# Altium PCB CSM_PCB.PcbDoc
Units mm, origin at the board's own origin, x right, y up, seen from the top; angles counter-clockwise.
Board outline 100 x 50 mm, 2 copper layers (Top Layer, Bottom Layer); 23 components, 19 nets, 82 pads, 0 vias.
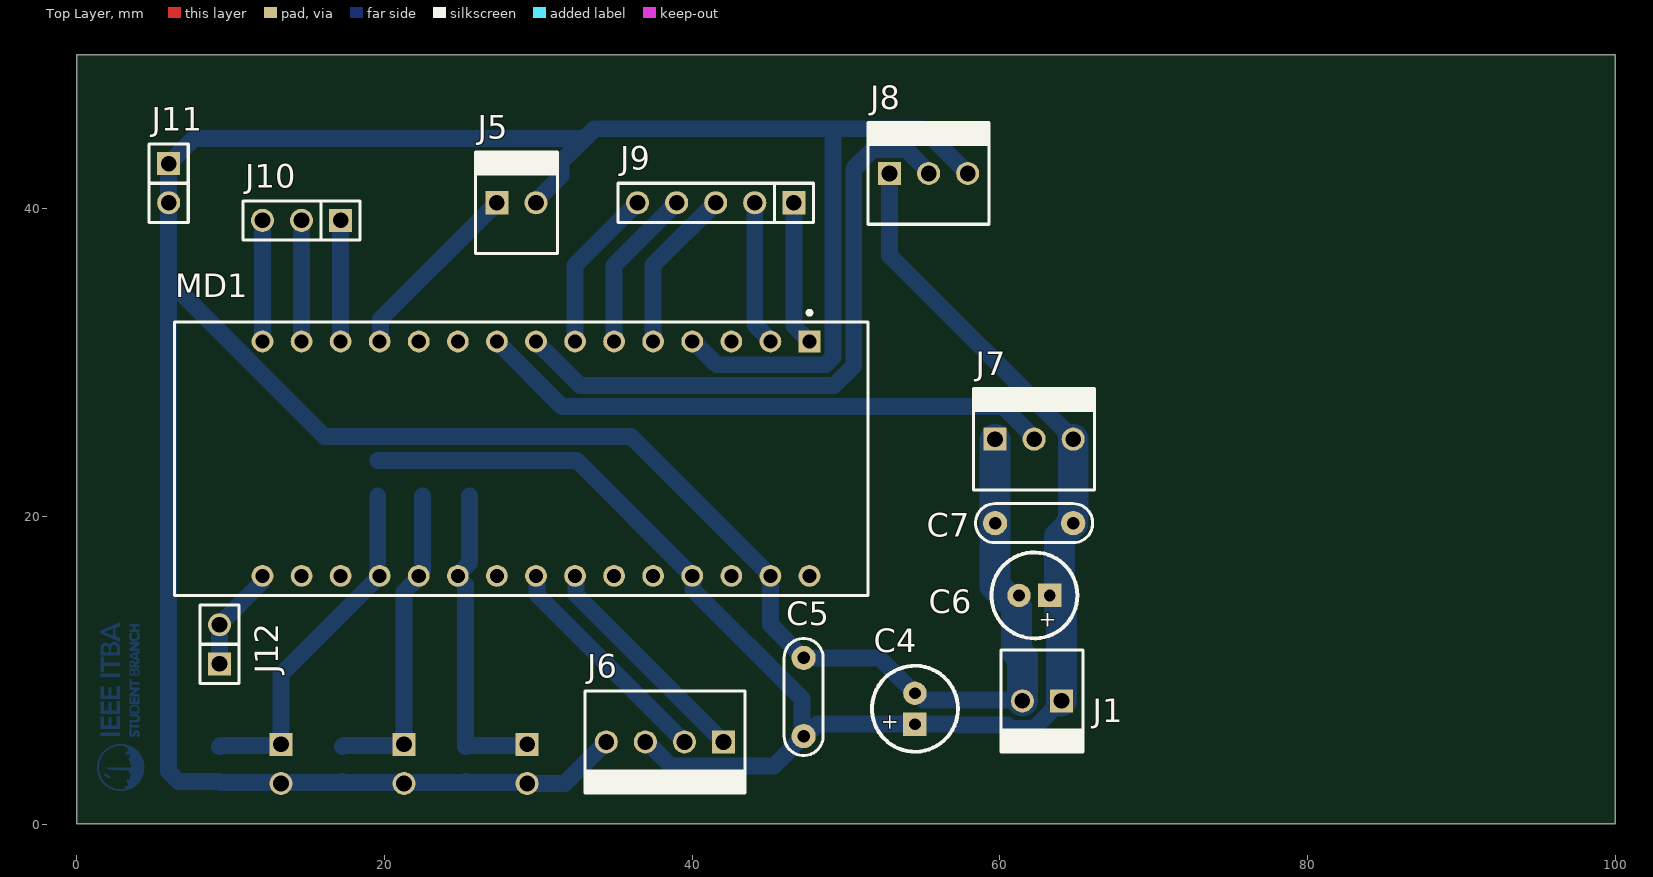
[diagram p0: Top Layer view]
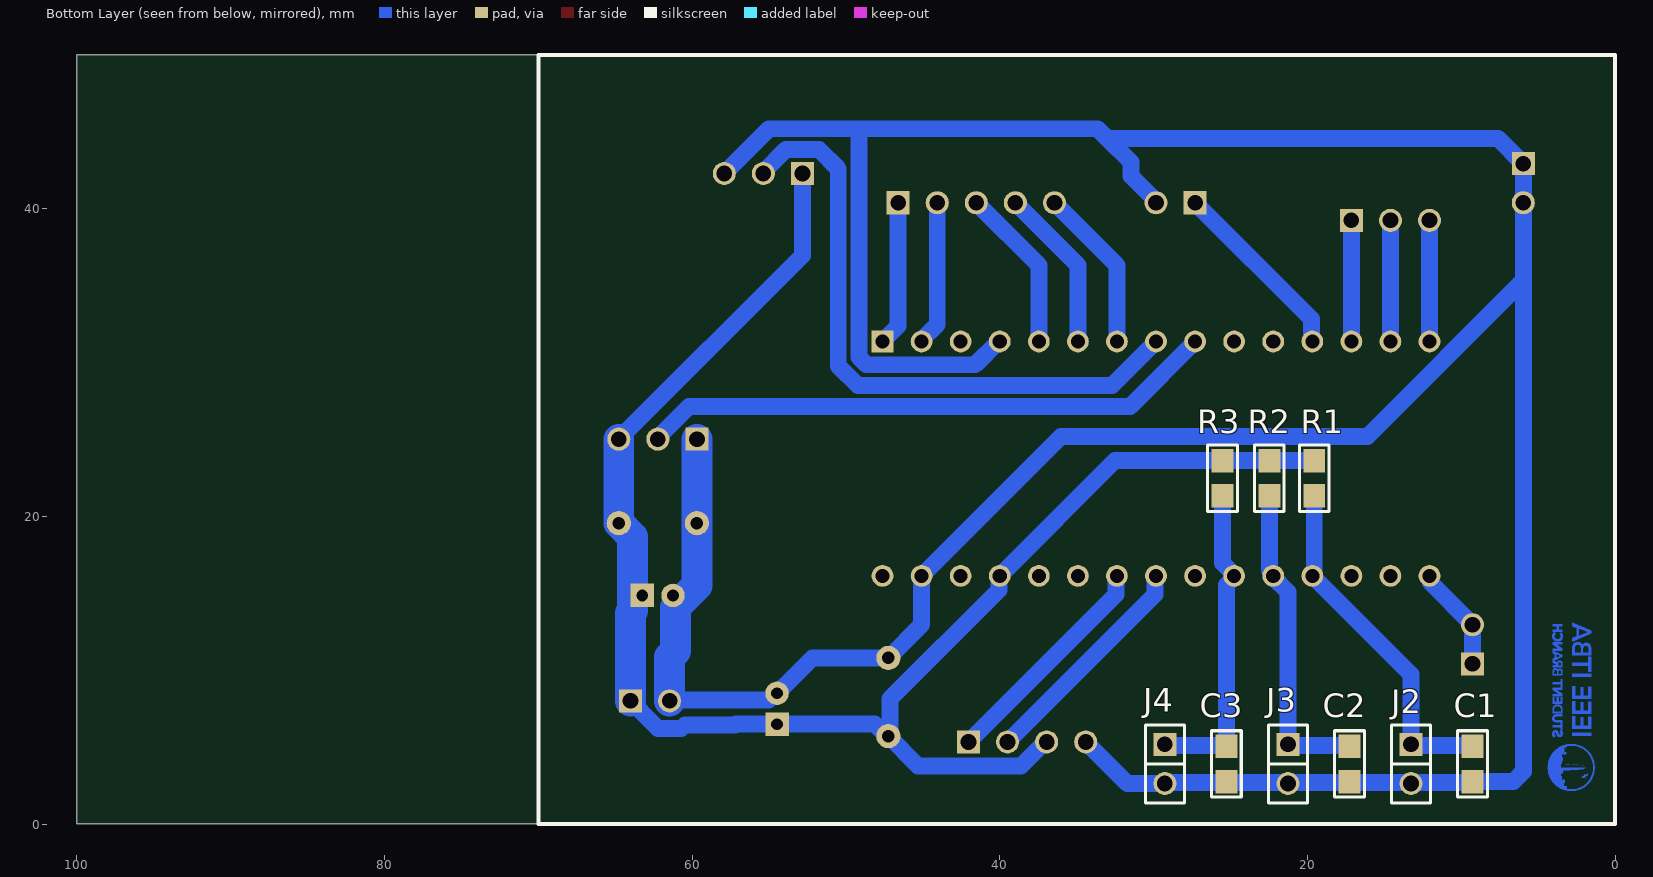
[diagram p1: Bottom Layer view, seen from below]

## Layer stack, top to bottom
Top Solder: solder mask 0.0102, Solder Resist, Dk 3.5
Top Layer: signal copper 0.0356
Dielectric 1: dielectric 0.32, FR-4, Dk 4.8
Bottom Layer: signal copper 0.0356
Bottom Solder: solder mask 0.0102, Solder Resist, Dk 3.5

## Board outline
0,0 0,50 100,50 100,0

## Design rules (kind name [scope] priority, off if disabled: settings)
Clearance [All] p1: gap=0.254 ignorepadtopadclearanceinfootprint=FALSE
PolygonConnect [All] p1: connectstyle=Relief reliefconductorwidth=0.254 reliefentries=4 polygonreliefangle="90 Angle" airgapwidth=0.254
RoutingVias [All] p1: holewidth=0.711 width=1.27 viastyle="Through Hole" minholewidth=0.711 minwidth=1.27 maxholewidth=0.711 maxwidth=1.27
SolderMaskExpansion [All] p1: expansion=0.102 istentingtop=FALSE
SupplyNets "Schematic Supply Nets_9" [InNet('Boton2')] p1: voltage=0.000
SupplyNets "Schematic Supply Nets_8" [InNet('+5')] p2: voltage=0.000
SupplyNets "Schematic Supply Nets_7" [InNet('Boton3')] p3: voltage=0.000
SupplyNets "Schematic Supply Nets_6" [InNet('Matrices')] p4: voltage=0.000
SupplyNets "Schematic Supply Nets_5" [InNet('GND')] p5: voltage=0.000
SupplyNets "Schematic Supply Nets_4" [InNet('Boton1')] p6: voltage=0.000
SupplyNets "Schematic Supply Nets_3" [InNet('SCL')] p7: voltage=0.000
SupplyNets "Schematic Supply Nets_2" [InNet('SDA')] p8: voltage=0.000
SupplyNets "Schematic Supply Nets_1" [InNet('DCF')] p9: voltage=0.000
SupplyNets "Schematic Supply Nets" [InNet('Buzzer')] p10: voltage=0.000
Width [All] p1: maxlimit=5 minlimit=0.254 preferedwidth=1.1 toplayer_maxwidth=0.254 toplayer_prefwidth=0.254 bottomlayer_minwidth=0.5 minimp=50.000000 maximp=50.000000 favimp=50.000000
30 further rules are at their usual default settings.

## Components (designator, comment, footprint, x,y, rotation, side; value= is the part's Value field where it differs from the comment)
C1 "100n" 0805 9.268,3.904 r270 bottom
C2 "100n" 0805 17.268,3.904 r270 bottom
C3 "100n" 0805 25.268,3.904 r270 bottom
C4 "10u" CAP100RP 54.483,7.493 r90 top
C5 "100n" CAP200 47.244,8.255 r90 top
C6 "10u" CAP100RP 62.246,14.859 r180 top
C7 "100n" CAP200 62.23,19.558 r180 top
J1 "Vcc" MOLEX2 64.008,8.001 r180 top
J2 "Button1" SIP2 13.268,3.904 r270 bottom
J3 "Button2" SIP2 21.268,3.904 r270 bottom
J4 "Button1" SIP2 29.268,3.904 r270 bottom
J5 "Buzzer" MOLEX2 27.305,40.386 r0 top
J6 "Pantalla" MOLEX4 42.037,5.334 r180 top
J7 "Matrices" MOLEX3 59.69,25.019 r0 top
J8 "DCF" MOLEX3 52.832,42.291 r0 top
J9 "Pines D0-D4" SIP5 46.609,40.386 r180 top
J10 "D10-D12" SIP3 14.605,39.243 r180 top
J11 "Ground" SIP2 5.969,41.656 r270 top
J12 "D13" SIP2 9.271,11.684 r90 top
MD1 "ARDUINO_NANO" FP-A000005-MFG 28.892,23.749 r270 top
R1 "10k" 0805 19.558,22.479 r270 bottom
R2 "10k" 0805 22.479,22.479 r270 bottom
R3 "10k" 0805 25.527,22.479 r270 bottom

## Footprints (in the part's own frame and the unit in brackets; to place one, negate y for a bottom-side part, rotate by r counter-clockwise, add the part's x,y. Pads: shape width x height; smd on the part's side, far side on the other; paste and mask are expansions set on the pad)
0805 [mil] "Pasivo 0805"
  rect 60x56 smd: 1(-45,0) 2(45,0)
  silkscreen extent -85,-38 85,38, body extent -40,-25 39,25, height 15
CAP100RP [mil] "Body diameter 5mm"
  rect 60x60 hole 30: 1(-39.37,0)
  round 60 hole 30: 2(39.37,0)
  silkscreen extent -110,-110 110,110, body extent -99,-99 99,100, height 454
CAP200 [mil]
  round 62 hole 32: 1(-100,0) 2(100,0)
  silkscreen extent -150,-50 150,50, body extent -110,-46 110,44, height 246
FP-A000005-MFG [mil]
  rect 55.67x55.67 hole 35.98 paste-99999 mask+0: 1(-300,737.5)
  round 55.67 hole 35.98 paste-99999 mask+0: 2(-300,637.5) 3(-300,537.5) 4(-300,437.5) 5(-300,337.5) 6(-300,237.5) 7(-300,137.5) 8(-300,37.5) 9(-300,-62.5) 10(-300,-162.5) 11(-300,-262.5) 12(-300,-362.5) 13(-300,-462.5) 14(-300,-562.5) 15(-300,-662.5) 16(300,-662.5) 17(300,-562.5) 18(300,-462.5) 19(300,-362.5) 20(300,-262.5) 21(300,-162.5) 22(300,-62.5) 23(300,37.5) 24(300,137.5) 25(300,237.5) 26(300,337.5) 27(300,437.5) 28(300,537.5) 29(300,637.5) 30(300,737.5)
  silkscreen extent -379,-888 350,888, body extent -354,-891 354,891, height 10
MOLEX2 [mm]
  rect 1.5x1.5 hole 1.016: 1(0,0)
  round 1.5 hole 1.016: 2(2.54,0)
  silkscreen extent -1.4,-3.3 3.94,3.3, body extent -1.27,-3.17 3.81,3.18, height 10.74
MOLEX3 [mm]
  rect 1.5x1.5 hole 1.016: 1(0,0)
  round 1.5 hole 1.016: 2(2.54,0) 3(5.08,0)
  silkscreen extent -1.4,-3.3 6.48,3.3, body extent -1.27,-3.17 6.35,3.17, height 10.74
MOLEX4 [mm]
  rect 1.5x1.5 hole 1.016: 1(0,0)
  round 1.5 hole 1.016: 2(2.54,0) 3(5.08,0) 4(7.62,0)
  silkscreen extent -1.4,-3.3 9.02,3.3, body extent -1.27,-3.17 8.89,3.18, height 10.74
SIP2 [mm]
  rect 1.5x1.5 hole 1.016: 1(-1.27,0)
  round 1.5 hole 1.016: 2(1.27,0)
  silkscreen extent -2.54,-1.27 2.54,1.27
SIP3 [mm]
  rect 1.5x1.5 hole 1.016: 1(-2.54,0)
  round 1.5 hole 1.016: 2(0,0) 3(2.54,0)
  silkscreen extent -3.81,-1.27 3.81,1.27, body extent -3.81,-1.3 3.81,1.24, height 8.38
SIP5 [mm]
  rect 1.5x1.5 hole 1.016: 1(0,0)
  round 1.5 hole 1.016: 2(2.54,0) 3(5.08,0) 4(7.62,0) 5(10.16,0)
  silkscreen extent -1.27,-1.27 11.43,1.27, body extent -1.27,-1.27 11.43,1.27, height 8.38

## Part data
C1 C2 C3 C5 C7: library part CAP
C4 C6: library part CAPPOL
J1: library part MOLEX2, "Tensión de alimentación"
J2 J3 J4 J11 J12: library part CON2
J5: library part MOLEX2
J6: library part MOLEX4
J7 J8: library part MOLEX3
J9: library part CON5
J10: library part CON3
MD1: library part CMP-189986-000002-1, "ARDUINO NANO ATMEGA328 EVAL BRD", Operating Supply Voltage=12V, Package Quantity=50, Core Architecture=AVR, Data Bus Width=8b, Evaluation Kit=Yes, Height=0.25inch, Interface=I2C, Length=7inch, Number of Bits=8, Packaging=Bulk, REACH SVHC="No SVHC", Series="AVR® ATmega", Weight=0.358383oz, Width=5inch
R1 R2 R3: library part RES

## Nets (pads, with @x,y where several pads share a name; then routed paths per layer and width w, separated by ;. In a path a pad name is that pad's centre, name@x,y a point inside that pad or via, vN(x,y) a via of type N, cw(c..) or ccw(c..) an arc to the next point about the centre after c; other vN are vias at no path point)
+5: C4.1 C5.1 C6.1 C7.1 J1.1 J6.3 J7.3 J8.1 MD1.27 R1.1 R2.1 R3.1 | length 106.3
  Bottom Layer w1.1: R1.1 R2.1 R3.1 32.512,23.622 MD1.27 40.065,16.069 40.065,15.222 47.153,8.134 47.153,5.806 C5.1 ; J6.3 37.065,5.334 38.619,3.78 45.309,3.78 C5.1 ; J8.1 52.832,36.957 J7.3 ; J1.1 63.272,7.265 63.272,7.254 62.215,6.197 60.721,6.197 60.471,6.447 57.213,6.447 57.167,6.493 C4.1 48.15,6.493 47.372,5.715 C5.1
  Bottom Layer w2: J1.1 64.008,13.716 63.881,13.843 63.881,18.669 C7.1 J7.3
Boton1: C1.1 J2.1 MD1.19 R1.2 | length 22.9
  Bottom Layer w1.1: C1.1 9.332,5.111 13.204,5.111 J2.1 13.268,9.712 MD1.19 19.685,16.214 19.558,16.341 R1.2
Boton2: C2.1 J3.1 MD1.20 R2.2 | length 20.7
  Bottom Layer w1.1: C2.1 17.331,5.111 21.204,5.111 J3.1 21.268,15.087 22.225,16.044 MD1.20 22.225,16.214 22.479,16.468 R2.2
Boton3: C3.1 J4.1 MD1.21 R3.2 | length 20.9
  Bottom Layer w1.1: R3.2 25.527,16.976 24.765,16.214 MD1.21 24.765,16.044 25.268,15.541 C3.1 25.331,5.111 29.205,5.111 J4.1
Buzzer: J5.1 MD1.12 | length 12.2
  Bottom Layer w1.1: MD1.12 19.745,31.429 19.745,32.826 J5.1
DCF: J8.2 MD1.8 | length 41.3
  Bottom Layer w1.1: MD1.8 32.71,28.504 49.226,28.504 50.503,29.781 50.503,42.599 51.749,43.845 53.915,43.845 55.372,42.388 J8.2
GND: C1.2 C2.2 C3.2 C4.2 C5.2 C6.2 C7.2 J1.2 J2.2 J3.2 J4.2 J5.2 J6.4 J7.1 J8.3 J11.1 J11.2 MD1.4 MD1.29 | length 240.5
  Bottom Layer w1.1: J5.2 29.845,40.494 31.477,42.126 31.477,43.034 33.02,44.577 ; J6.4 31.717,2.634 J4.2 29.205,2.698 25.331,2.698 C3.2 25.204,2.698 21.331,2.698 J3.2 21.204,2.698 17.331,2.698 C2.2 17.204,2.698 13.331,2.698 J2.2 13.204,2.698 9.332,2.698 C1.2 6.613,2.761 5.969,3.405 5.969,35.328 ; MD1.4 40.09,31.369 41.601,29.858 48.665,29.858 49.149,30.342 49.149,45.199 ; J8.3 55.004,45.199 49.149,45.199 ; J1.2 61.41,8.059 55.032,8.059 54.598,8.493 C4.2 52.181,10.795 C5.2 45.085,12.954 MD1.29 36.026,25.188 16.109,25.188 5.969,35.328 ; 5.969,35.328 J11.2 J11.1 7.62,44.577 33.02,44.577 ; 33.02,44.577 33.642,45.199 49.149,45.199
  Bottom Layer w2: J7.1 C7.2 59.69,15.494 61.087,14.097 61.087,11.24 61.468,10.859 J1.2
Matrices: J7.2 MD1.9 | length 37.6
  Bottom Layer w1.1: MD1.9 31.524,27.15 60.196,27.15 62.23,25.116 J7.2
NetJ9_1: J9.1 MD1.1 | length 9.4
  Bottom Layer w1.1: J9.1 46.609,32.385 MD1.1
NetJ9_2: J9.2 MD1.2 | length 9.4
  Bottom Layer w1.1: J9.2 44.069,32.47 45.085,31.454 MD1.2
NetJ9_3: J9.3 MD1.5 | length 10.7
  Bottom Layer w1.1: MD1.5 37.465,36.322 J9.3
NetJ9_4: J9.4 MD1.6 | length 10.7
  Bottom Layer w1.1: MD1.6 34.925,36.322 J9.4
NetJ9_5: J9.5 MD1.7 | length 10.7
  Bottom Layer w1.1: MD1.7 32.385,36.322 J9.5
NetJ10_1: J10.1 MD1.13 | length 7.9
  Bottom Layer w1.1: MD1.13 J10.1
NetJ10_2: J10.2 MD1.14 | length 7.9
  Bottom Layer w1.1: MD1.14 J10.2
NetJ10_3: J10.3 MD1.15 | length 7.9
  Bottom Layer w1.1: MD1.15 J10.3
NetJ12_1: J12.1 J12.2 MD1.16 | length 6.9
  Bottom Layer w1.1: J12.1 J12.2 12.005,15.688 12.005,16.069 MD1.16
SCL: J6.1 MD1.24 | length 14.8
  Bottom Layer w1.1: MD1.24 32.445,16.069 32.445,14.926 J6.1
SDA: J6.2 MD1.23 | length 14.8
  Bottom Layer w1.1: MD1.23 29.905,16.069 29.905,14.926 J6.2
pads on no net: MD1.3 MD1.10 MD1.11 MD1.17 MD1.18 MD1.22 MD1.25 MD1.26 MD1.28 MD1.30

## Other copper
Bottom Layer:
  drawing of 21 lines, arcs and shapes, not listed

## Silkscreen, mask and mechanical layers (free items; w line width, h text height)
Bottom Overlay:
  lines w0.254: 0,0 70,0 70,50 0,50 0,0

## Text inside footprints (layer, text, board x,y; h text height)
C4: Top Overlay "+" at 53.315,6.045 h1.02 r90
C6: Top Overlay "+" at 63.694,13.691 h1.02 r180